# Altium PCB Design_Challenge_PCB.PcbDoc
Units mil, origin at the board's own origin, x right, y up, seen from the top; angles counter-clockwise.
Board outline 6000 x 4000 mil, 2 copper layers (Top Layer, Bottom Layer), stack 61.756 mil thick; 25 components, 17 nets, 68 pads, 0 vias.
Unrouted connection lines stored in the file: 28.
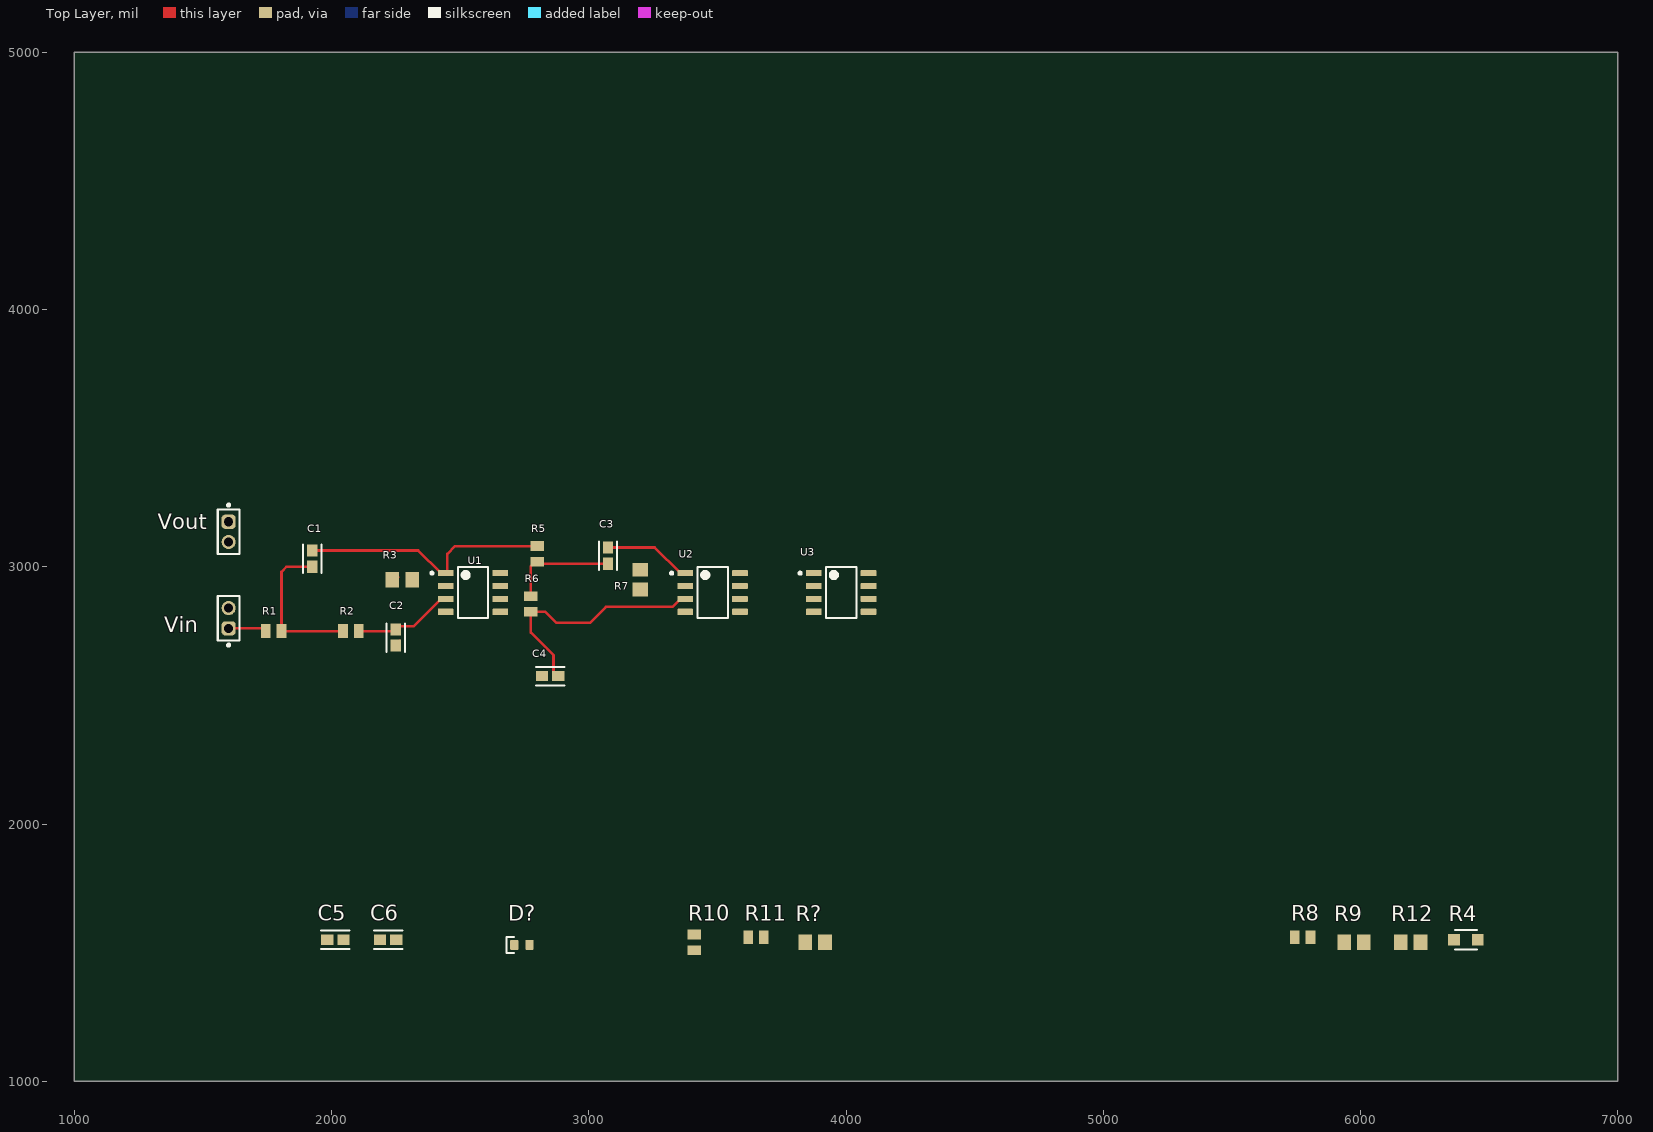
[diagram p0: Top Layer view]
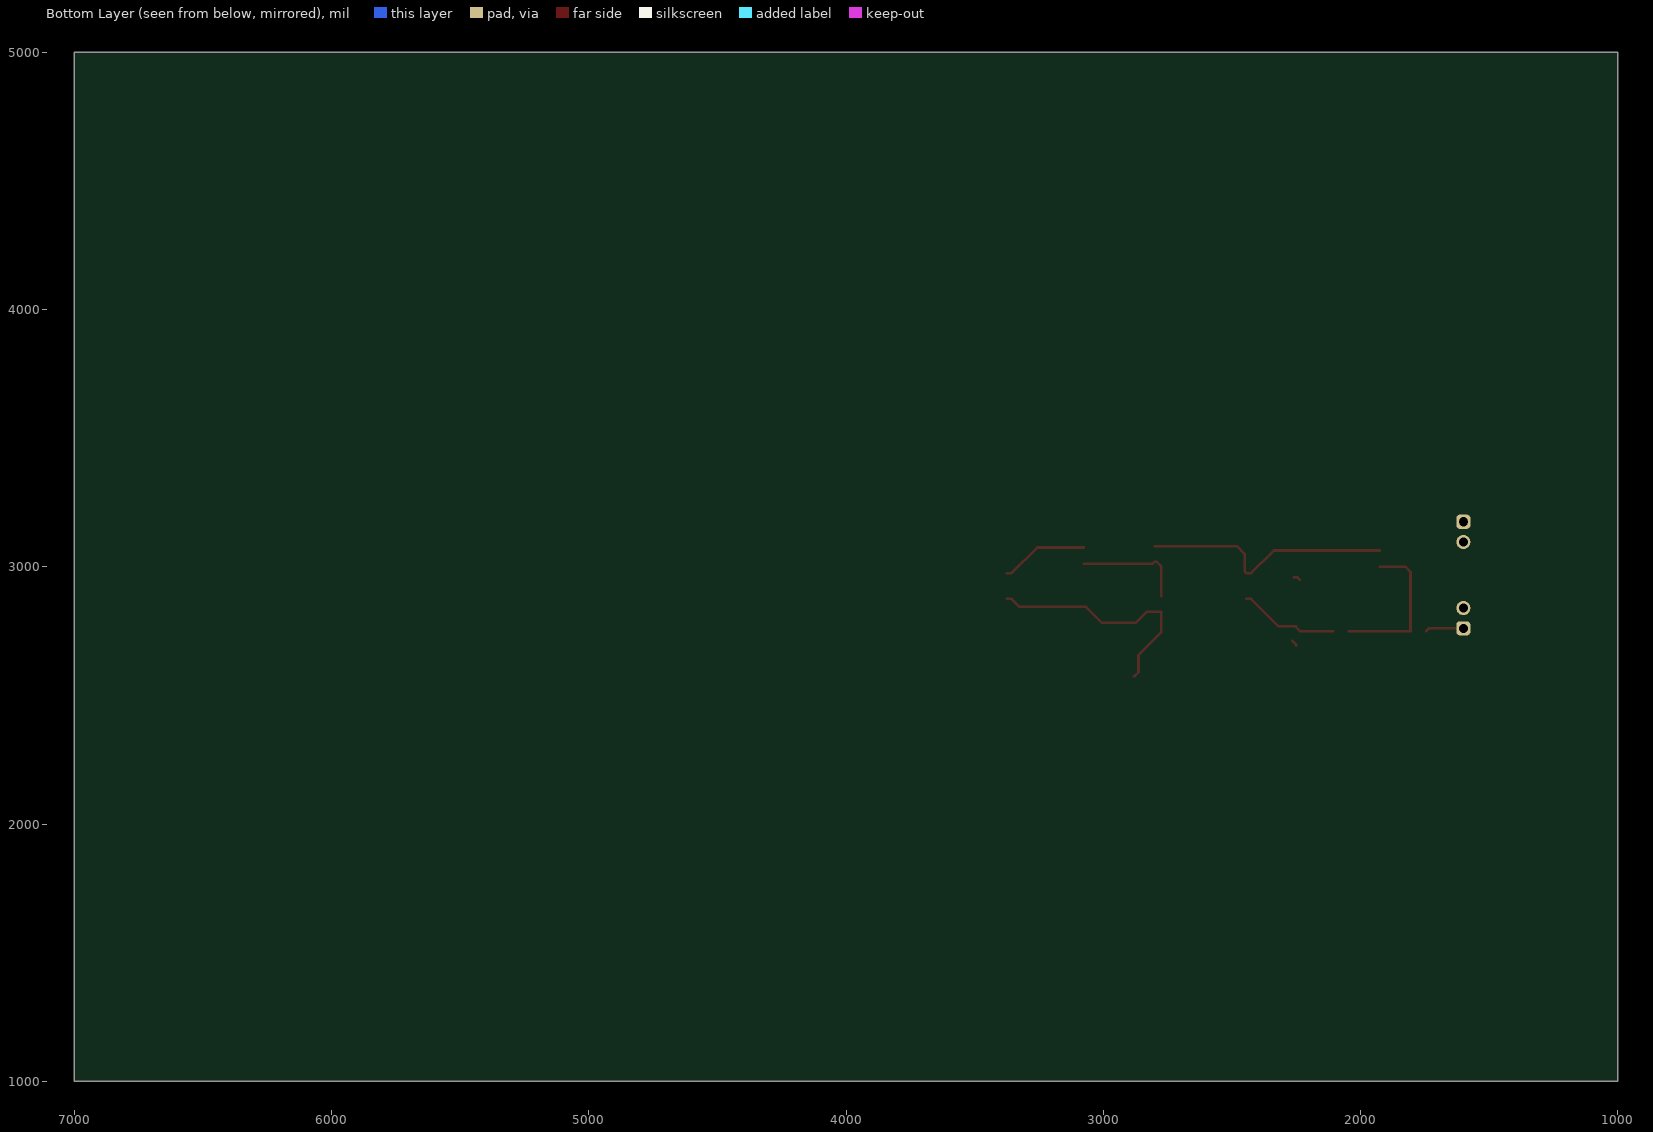
[diagram p1: Bottom Layer view, seen from below]

## Layer stack, top to bottom
Top Solder: solder mask 1, SM-001, Dk 4
Top Layer: signal copper 1.378
Dielectric 1: core 59, Core-043, Dk 4.3
Bottom Layer: signal copper 1.378
Bottom Solder: solder mask 1, SM-001, Dk 4

## Board outline
1000,1000 7000,1000 7000,5000 1000,5000

## Design rules (kind name [scope] priority, off if disabled: settings)
Clearance [All] p1: gap=10 ignorepadtopadclearanceinfootprint=FALSE
PolygonConnect [All] p1: connectstyle=Relief reliefconductorwidth=10 reliefentries=4 polygonreliefangle="90 Angle" airgapwidth=10
RoutingVias [All] p1: holewidth=28 width=50 viastyle="Through Hole" minholewidth=28 minwidth=50 maxholewidth=28 maxwidth=50
SolderMaskExpansion [All] p1: expansion=4 istentingtop=FALSE
SupplyNets "Schematic Supply Nets_2" [InNet('-12')] p1: voltage=0.000
SupplyNets "Schematic Supply Nets_1" [InNet('+12')] p2: voltage=0.000
SupplyNets "Schematic Supply Nets" [InNet('GND')] p3: voltage=0.000
Width [All] p1: maxlimit=10 minlimit=10 preferedwidth=10
30 further rules are at their usual default settings.

## Components (designator, comment, footprint, x,y, rotation, side; value= is the part's Value field where it differs from the comment)
C1 "100nF" FP-GRM188-0_1-e0_2_0_55-IPC_A 1925,3031.57 r90 top
C2 "100nF" FP-GRM188-0_1-e0_2_0_55-IPC_A 2250,2725 r270 top
C3 "100nF" FP-GRM188-0_1-e0_2_0_55-IPC_A 3075,3043.43 r90 top
C4 "100nF" FP-GRM188-0_1-e0_2_0_55-IPC_A 2850,2575 r180 top
C5 "100nF" FP-GRM188-0_1-e0_2_0_55-IPC_A 2015,1550 r0 top
C6 "100nF" FP-GRM188-0_1-e0_2_0_55-IPC_A 2220,1550 r0 top
D? "RED" LED_0603_RED 2740,1530 r0 top
R1 "845" RESC2013X70X40LL20T20 1775,2750 r0 top
R2 "845" RESC2013X70X40LL20T20 2075,2750 r0 top
R3 "1k" RESC2013X70X40ML20T20 2275,2950 r0 top
R4 "1.5k" FP-ERJ6EN-MFG 6410,1550 r0 top
R5 "845" RESC2013X70X40LL20T20 2800,3050 r270 top
R6 "845" RESC2013X70X40LL20T20 2775,2855.51 r270 top
R7 "1k" RESC2013X70X40ML20T20 3200,2950 r90 top
R8 "590" RESC2013X70X40LL20T20 5775,1560 r0 top
R9 "1k" RESC2013X70X40ML20T20 5975,1540 r0 top
R10 "845" RESC2013X70X40LL20T20 3410,1540 r90 top
R11 "845" RESC2013X70X40LL20T20 3650,1560 r0 top
R12 "68" RESC2013X70X40ML20T20 6195,1540 r0 top
R? "1k" RESC2013X70X40ML20T20 3880,1540 r0 top
U1 "LM358DR" FP-D0008A-MFG 2550,2900 r0 top
U2 "LM358DR" FP-D0008A-MFG 3481.3,2900 r0 top
U3 "LM358DR" FP-D0008A-MFG 3981.3,2900 r0 top
Vin "62000211121" 62000211121 1600,2800 r90 top (schematic designator P1)
Vout "62000211121" 62000211121 1600,3135.63 r270 top (schematic designator P2)

## Footprints (in the part's own frame and the unit in brackets; to place one, negate y for a bottom-side part, rotate by r counter-clockwise, add the part's x,y. Pads: shape width x height; smd on the part's side, far side on the other; paste and mask are expansions set on the pad)
62000211121 [mm] "Pin Header, pitch 2.00 mm, THT, Vertical, single row, 2p"
  rrect50% 1.4x1.4 hole 0.9: 1(-1,0)
  round 1.4 hole 0.9: 2(1,0)
  silkscreen extent -2.77,-1.07 2.2,1.07, body extent -2,-1 2,1, height 6.05
FP-D0008A-MFG [mm]
  rrect17% 1.55x0.6 smd paste+0 mask+0: 1(-2.7,1.905) 2(-2.7,0.635) 3(-2.7,-0.635) 4(-2.7,-1.905) 5(2.7,-1.905) 6(2.7,-0.635) 7(2.7,0.635) 8(2.7,1.905)
  silkscreen extent -4.17,-2.5 1.5,2.5, body extent -3.57,-2.75 3.57,2.75, height 0.25
FP-ERJ6EN-MFG [mm]
  rect 1.15x1.15 smd paste+0 mask+0: 1(-1.175,0) 2(1.175,0)
  silkscreen extent -1.1,-0.97 1.1,0.97, body extent -1.85,-0.77 1.85,0.77, height 0.25
FP-GRM188-0_1-e0_2_0_55-IPC_A [mil]
  rect 47.57x39.85 smd paste+0 mask+0: 1(-31.57,0) 2(31.57,0)
  silkscreen extent -55,-36 55,36, body extent -75,-40 75,40, height 10
LED_0603_RED [mm]
  rrect25% 0.8x1 smd: A(0.75,0) K(-0.75,0)
  silkscreen extent -1.5,-0.8 -0.8,0.8, body extent -0.8,-0.4 0.8,0.4, height 0.6
RESC2013X70X40LL20T20 [mm] "Chip Resistor, 2-Leads, Body 2.00x1.25mm, IPC High Density"
  rect 0.95x1.35 smd: 1(-0.775,0) 2(0.775,0)
  body extent -1.1,-0.72 1.1,0.72, height 0.7
RESC2013X70X40ML20T20 [mm] "Chip Resistor, 2-Leads, Body 2.00x1.25mm, IPC Low Density"
  rect 1.35x1.55 smd: 1(-0.975,0) 2(0.975,0)
  body extent -1.1,-0.72 1.1,0.72, height 0.7

## Part data
C1 C2 C3 C4 C5 C6: library part CMP-2006-02792-2, "Chip Multilayer Ceramic Capacitors for General Purpose, 0603, 10uF, X5R, 15%, 20%, 6.3V", Capacitance=10uF, Case Code (Imperial)=0603, Case Code (Metric)=1608, Dielectric=X5R, Max Operating Temperature=85°C, Min Operating Temperature=-55°C, Package Quantity=4000, Tolerance=20%, Voltage=6.3V, Case/Package=0603, Depth=0.8mm, Height=0.8mm, Lead Free="Lead Free", Length=1.6mm, Material=Ceramic, Mount="Surface Mount", Packaging="Tape and Reel", Radiation Hardening=No, REACH SVHC="No SVHC", Termination=SMD/SMT, Thickness=0.035inch, Voltage Rating=6.3V, Voltage Rating (DC)=6.3V, Width=0.031inch
D?: library part LED_0603_RED, "LED 0603 RED SMD"
R1 R2 R5 R6 R10 R11: library part CMP-2001-00308-1, Manufacturer=Panasonic, Part Number=ERJ-6ENF8450V
R3 R7 R9 R?: library part CMP-2001-04375-5, "Chip Resistor, 1 KOhm, +/- 1%, 0.125 W, -55 to 155 degC, 0805 (2012 Metric), RoHS, Tape and Reel", Manufacturer=Panasonic, Max Operating Temperature="155 degC", Min Operating Temperature="-55 degC", Package Quantity=1, Voltage Rating="150 V", ComponentLink1Description="Manufacturer URL", ComponentLink1URL=http://www.panasonic.com/, ComponentLink2Description=Datasheet, ComponentLink2URL=http://industrial.panasonic.com/cdbs/www-data/pdf/RDA0000/AOA0000C86.pdf, DatasheetVersion=04/2015, Height="0.6 mm", Length="2 mm", Mount="Surface Mount", Mounting Technology="Surface Mount", PackageDescription="2-Pin Surface Mount Device, Body 2 x 1.25 mm", PackageReference=0805, Packaging="Cut Tape", REACH SVHC=Yes, RoHSCompliant=true
R4: library part CMP-2001-04438-5, "RES SMD 1.5K OHM 1% 1/8W 0805", Case Code (Imperial)=0805, Case Code (Metric)=2012, Max Operating Temperature=155°C, Max Power Dissipation=125mW, Min Operating Temperature=-55°C, Package Quantity=1, Resistance=1.5kR, Resistance Tolerance=1%, Resistor Type="Thick Film", Temperature Coefficient=100ppm/°C, Voltage Rating=150V, Case/Package=0805, Construction=Rectangular, Contact Plating=Tin, Depth=1.25mm, Features="Automotive AEC-Q200", Height=0.6mm, Lead Free="Lead Free", Length=2mm, Military Standard=Not, Mount="Surface Mount", Number of Pins=2, Number of Terminations=2, Packaging="Tape and Reel", Power Rating=125mW, Radiation Hardening=No, Reach SVHC Compliant=Yes, RoHS Compliant=Yes, Series=ERJ, Size Code=0805, Technology="THICK FILM", Termination=SMD/SMT, Tolerance=1%, Voltage Rating (DC)=150V, Width=1.2mm
R8: library part CMP-2001-00245-1, Manufacturer=Panasonic, Part Number=ERJ-6ENF5900V
R12: library part CMP-2001-00570-1, Manufacturer=Panasonic, Part Number=ERJ6ENF68R0V
U1 U2 U3: library part CMP-1685-00009-2, "IC OPAMP GP 2 CIRCUIT 8SOIC", Case/Package=SOIC, Dual Supply Voltage=9V, Input Bias Current=250nA, Input Offset Voltage (Vos)=7mV, Max Dual Supply Voltage=16V, Max Operating Temperature=70°C, Max Supply Voltage=32V, Min Dual Supply Voltage=1.5V, Min Operating Temperature=0°C, Min Supply Voltage=3V, Nominal Supply Current=1.2mA, Operating Supply Current=1mA, Output Current=30mA, Package Quantity=2500, Power Supply Rejection Ratio (PSRR)=65dB, Voltage Gain=100dB, Bandwidth=700kHz, Common Mode Rejection Ratio=65dB, Contact Plating=Gold, Gain Bandwidth Product=700kHz, Height=1.58mm, Lead Free="Lead Free", Length=4.9mm, Mount="Surface Mount", Number of Amplifiers=2, Number of Channels=2, Number of Circuits=2, Number of Elements=2, Number of Pins=8, Operating Supply Voltage=16V, Output Current per Channel=30mA, Packaging="Tape and Reel", Radiation Hardening=No, REACH SVHC="No SVHC", Slew Rate=0.3V/µs, Unity Gain Bandwidth Product=700kHz, Width=3.91mm
Vin Vout: library part CMP-1502-00956-4, Contact Resistance=20mΩ, Current Rating=2A, Max Operating Temperature=105°C, Min Operating Temperature=-40°C, Operating Supply Voltage=200V, Contact Material=Gold, Gender=Male, Height=6.35mm, Lead Pitch=2mm, NexarPartId=61924778, Number Of Contacts=2, Number of Pins=2, Number of Rows=1, Orientation=Vertical, RoHS=Non-Compliant, Voltage Rating=200V

## Nets (pads, with @x,y where several pads share a name; then routed paths per layer and width w, separated by ;. In a path a pad name is that pad's centre, name@x,y a point inside that pad or via, vN(x,y) a via of type N, cw(c..) or ccw(c..) an arc to the next point about the centre after c; other vN are vias at no path point)
+12: U1.4 U2.4 U3.4
-12: U1.8 U2.8 U3.8
GND: C2.2 C4.2 C6.2 R3.1 R7.1 R9.1 Vin.2 Vout.2 | length 62.7
  Top Layer w10: Vin.2@1592.8,2846.57 Vin.2 ; R3.1 2246.61,2960 R3.1@2260,2960 ; C2.2 2250,2697.29 C2.2@2264.92,2712.22
NetC1_1: C1.1 R1.2 R2.1 | length 597
  Top Layer w10: C1.1 1825,3000 1805.51,2980.51 R1.2 R2.1
NetC1_2: C1.2 R4.2 R5.1 U1.1 | length 995.5
  Top Layer w10: C1.2 2336.86,3063.14 2425,2975 U1.1 2450,2981.3 2450,3050 2480.51,3080.51 R5.1
NetC2_1: C2.1 R2.2 U1.3 | length 392
  Top Layer w10: R2.2 2235.08,2750 2250,2764.92 2250,2768.43 2318.43,2768.43 2425,2875 U1.3
NetC3_1: C3.1 R5.2 R6.1 | length 426.6
  Top Layer w10: R6.1 2775,3002.36 2792.13,3019.49 R5.2 2807.63,3011.86 C3.1
NetC3_2: C3.2 R8.2 R10.1 U2.1 | length 341.4
  Top Layer w10: C3.2 3256.3,3075 3356.3,2975 U2.1
NetC4_1: C4.1 R6.2 U2.3 | length 953.1
  Top Layer w10: C4.1 2877.71,2575 2862.78,2589.92 2862.78,2656.72 2775,2744.5 R6.2 2831.57,2825 2875,2781.57 3004.21,2781.57 3067.13,2844.49 3325.79,2844.49 3356.3,2875 U2.3
NetC5_1: C5.1 R10.2 R11.1
NetC5_2: C5.2 R12.2 R?.1 U3.1
NetC6_1: C6.1 R11.2 U3.3
NetD?_A: D?.A R?.2
NetP1_1: R1.1 Vin.1 | length 148.9
  Top Layer w10: Vin.1 1733.86,2760.63 R1.1
NetR3_2: R3.2 R4.1 U1.2
NetR7_2: R7.2 R8.1 U2.2
NetR9_2: R9.2 R12.1 U3.2
pads on no net: D?.K U1.5 U1.6 U1.7 U2.5 U2.6 U2.7 U3.5 U3.6 U3.7 Vout.1

## Text inside footprints (layer, text, board x,y; h text height)
D?: Top 3D Body "+" at 2791.84,1553.96 h19.68